# Altium PCB PCB.PcbDoc
Units mil, origin at the board's own origin, x right, y up, seen from the top; angles counter-clockwise.
Board outline 1696.7 x 734.6 mil, 2 copper layers (Top Layer, Bottom Layer); 28 components, 23 nets, 102 pads, 24 vias.
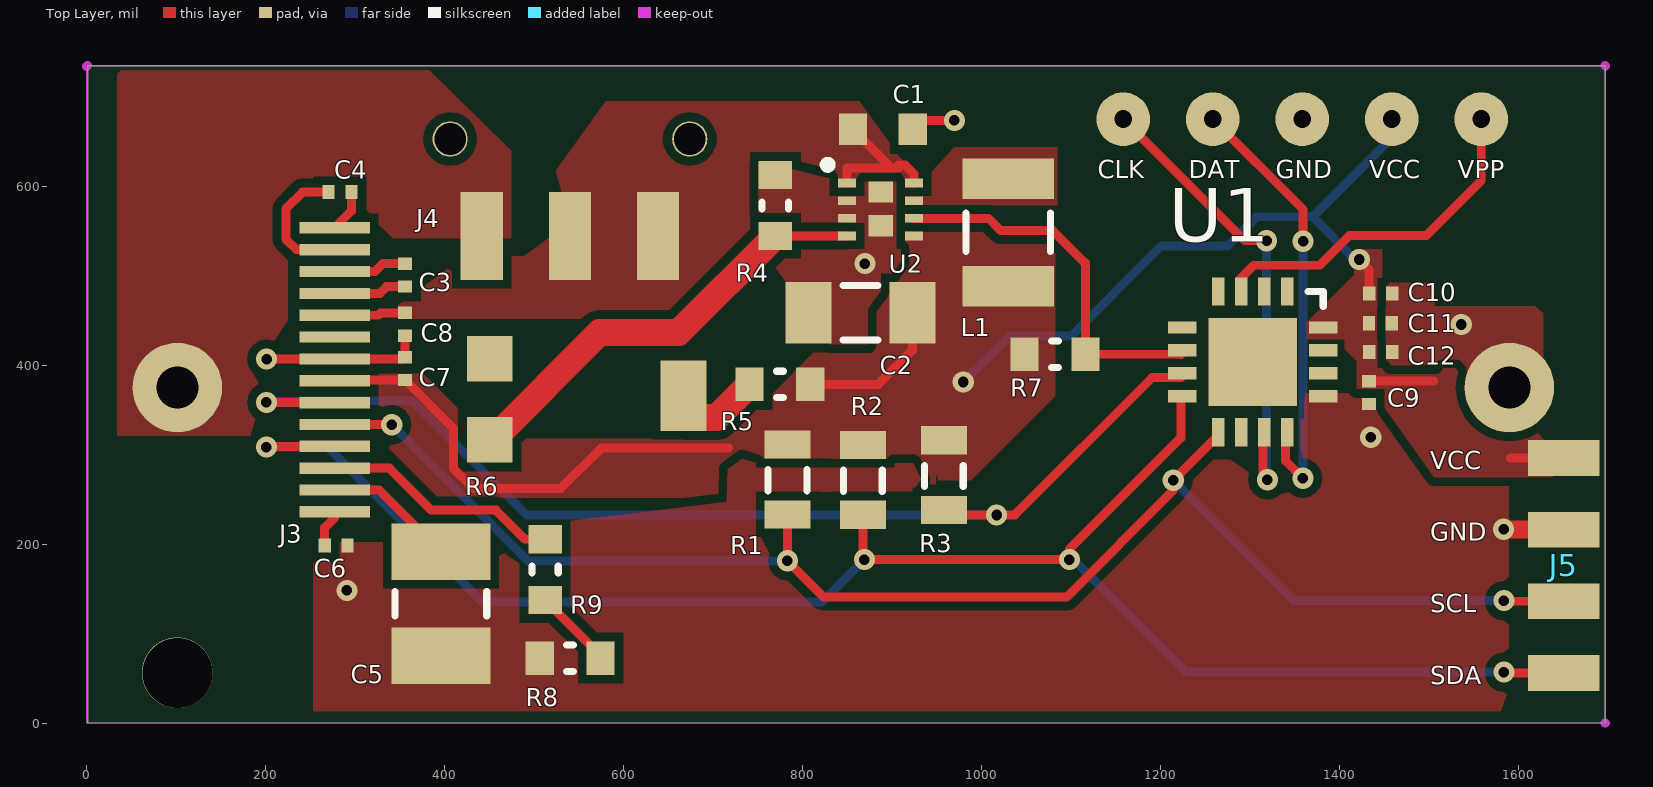
[diagram p0: Top Layer view]
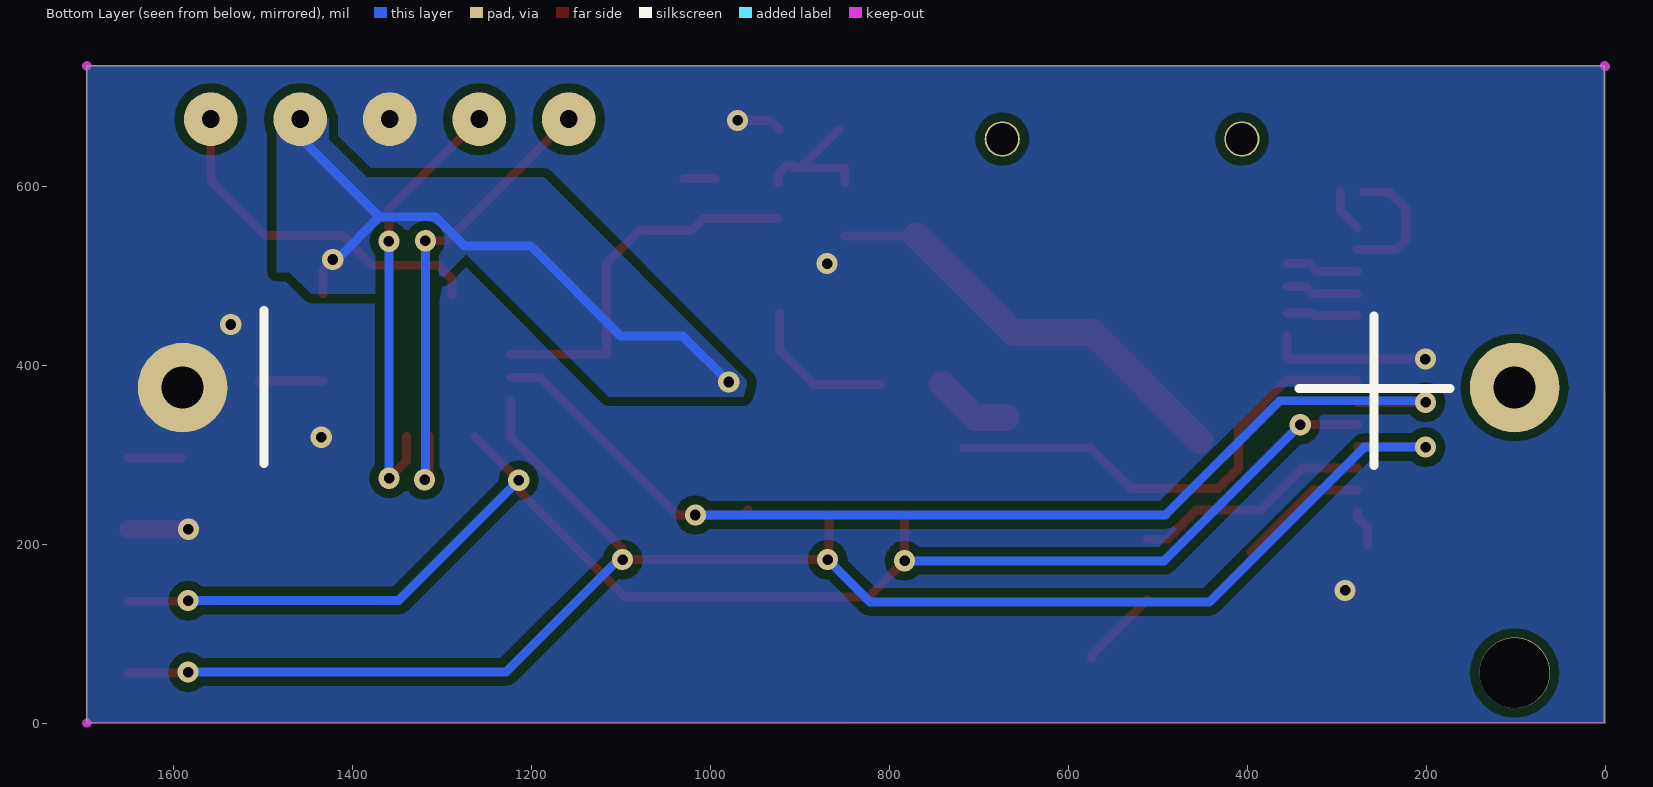
[diagram p1: Bottom Layer view, seen from below]

## Layer stack, top to bottom
Top Solder: solder mask 0.4, Solder Resist, Dk 3.5
Top Layer: signal copper 1.4
Dielectric1: dielectric 12.6, FR-4, Dk 4.8
Bottom Layer: signal copper 1.4
Bottom Solder: solder mask 0.4, Solder Resist, Dk 3.5

## Board outline
0.1,0.1 1.1,1.1 1.1,734.4 1696.5,734.4 1696.8,734.1 1696.8,-0.2

## Design rules (kind name [scope] priority, off if disabled: settings)
Clearance [All] p1: gap=10 ignorepadtopadclearanceinfootprint=FALSE except(0: Arc-Hole Track-Hole SMDPad-Hole THPad-Hole Via-Hole Fill-Hole Poly-Hole Region-Hole Text-Hole)
PlaneConnect [All] p1: planeconnectstyle=Direct reliefexpansion=20 reliefentries=4 reliefconductorwidth=10 reliefairgap=10
PolygonConnect [All] p1: connectstyle=Direct reliefconductorwidth=10 reliefentries=4 polygonreliefangle="90 Angle" airgapwidth=10
RoutingVias [All] p1: holewidth=28 width=50 viastyle="Through Hole" minholewidth=28 minwidth=50 maxholewidth=28 maxwidth=50
SilkToSolderMaskClearance SilkscreenOverComponentPads [IsPad] p1: minsilkscreentomaskgap=10 clearancetoexposedcopper=TRUE
SolderMaskExpansion [All] p1: expansion=4 istentingtop=FALSE
Width [All] p1: maxlimit=30 minlimit=10 preferedwidth=10
28 further rules are at their usual default settings.

## Components (designator, comment, footprint, x,y, rotation, side; value= is the part's Value field where it differs from the comment)
C1 "10uF CON1608" CAPC1608X06N 889.6,663.3 r180 top
C2 "22uF CON3216" CAPC3216X06N 864.6,458.3 r0 top
C3 "1uF 16V X5R CON0603" CAPC0603X06N 355.9,513.3 r270 top
C4 "1uF 16V X5R CON0603" CAPC0603X06N 295.9,593.3 r180 top
C5 "4.7uF 16V X7R CON3528-31" CAPC3524X06N 395.9,133.3 r90 top
C6 "2.2uF CON0603" CAPC0603X06N 265.9,198.3 r0 top
C7 "1uF CON0603" CAPC0603X06N 355.9,383.3 r90 top
C8 "1uF CON0603" CAPC0603X06N 355.9,458.3 r270 top
C9 "100nFCON0603" CAPC0603X06N 1432.7,356.5 r90 top
C10 "100nF CON0603" CAPC0603X06N 1458.6,479.9 r180 top
C11 "" CAPC0603X06N 1458.3,446.7 r180 top
C12 "100nF CON0603" CAPC0603X06N 1458.7,414.4 r180 top
J3 "PANTALLA" PANTALLA 325.9,553.3 r180 top
J4 "SLIDER" JS102011SAQN 540,544.3 r180 top
J5 "SENSORCONECTOR" ConectorSMD1,3mm 1650.4,124.4 r0 top
L1 "2.2uH INDCM322522" INDC3225X06N 1029.6,548.3 r270 top
R1 "10k RES2012" RESC2012X06N 783,271.2 r90 top
R2 "10k RES2012" RESC2012X06N 867.3,270.8 r90 top
R3 "10k RES2012" RESC2012X06N 957.8,276 r90 top
R4 "20k RES1608" RESC1608X06N 769.6,578.3 r270 top
R5 "110k RES1608" RESC1608X06N 774.6,378.3 r0 top
R6 "POTENCIOMETRO 10k" POTENCIOMETRO 450.5,316.6 r90 top
R7 "110k RES1608" RESC1608X06N 1082,412.1 r0 top
R8 "20k RES1608" RESC1608X06N 540.3,72.6 r0 top
R9 "110k RES1608" RESC1608X06N 512.2,171.4 r90 top
U1 "PIC16F1825" "PIC16(L)F1825 QFN" 1302.9,403.6 r270 top
U2 "TPS62080A" TPS62080 849.6,603.3 r0 top
? "BATERIA" BATERIA 101.5,374.9 r90 top locked

## Footprints (in the part's own frame and the unit in brackets; to place one, negate y for a bottom-side part, rotate by r counter-clockwise, add the part's x,y. Pads: shape width x height; smd on the part's side, far side on the other; paste and mask are expansions set on the pad)
BATERIA [mm]
  round 2.54 hole 1.19: 0(0,0) 1(0,-37.8)
  body extent -9.15,-40.35 9.15,2.55, height 17.3
CAPC0603X06N [mm] "Chip Capacitor, 2-Leads, Body 0,6x0,3mm, IPC Medium Density"
  rect 0.35x0.4 smd: 1(0,0) 2(0.65,0)
  body extent 0,-0.18 0.65,0.17, height 0.6
CAPC1608X06N [mm] "Chip Capacitor, 2-Leads, Body 1,6x0,8mm, IPC Medium Density"
  rect 0.8x0.9 smd: 1(-0.85,0) 2(0.85,0)
  body extent -0.8,-0.4 0.8,0.4, height 0.6
CAPC3216X06N [mm] "Chip Capacitor, 2-Leads, Body 3,2x1,6mm, IPC Medium Density"
  rect 1.3x1.75 smd: 1(-1.475,0) 2(1.475,0)
  silkscreen extent -0.5,-0.77 0.5,0.77, body extent -1.6,-0.8 1.6,0.8, height 0.6
CAPC3524X06N [mm] "Chip Capacitor, 2-Leads, Body 3,5x2,4mm, IPC Medium Density"
  rect 1.6x2.8 smd: 1(-1.475,0) 2(1.475,0)
  silkscreen extent -0.35,-1.3 0.35,1.3, body extent -1.75,-1.4 1.75,1.4, height 0.6
ConectorSMD1,3mm [mil]
  rect 80x40 smd: 0(0,-68.3) 1(0,11.7) 2(0,91.7) 3(0,171.7)
INDC3225X06N [mm] "Chip Inductor, 2-Leads, Body 3,2x2,5mm, IPC Medium Density"
  rect 1.15x2.6 smd: 1(-1.525,0) 2(1.525,0)
  silkscreen extent -0.55,-1.2 0.55,1.2, body extent -1.62,-1.26 1.62,1.26, height 0.6
JS102011SAQN [mm]
  rect 1.2x2.5 smd: 0(-2.5,0) 1(0,0) 2(2.5,0)
  round 1 hole 0.9: 5(-3.4,-2.75)
  round 1 hole 0.9 mask+0.102: 5(3.4,-2.75)
  body extent -4.5,-6.85 4.5,-1.25, height 3.5
PANTALLA [mm] "96x16 de Midas"
  rect 2x0.32 smd: 1(1.24,0) 2(1.24,0.62) 3(1.24,1.24) 4(1.24,1.86) 5(1.24,2.48) 6(1.24,3.1) 7(1.24,3.72) 8(1.24,4.34) 9(1.24,4.96) 10(1.24,5.58) 11(1.24,6.2) 12(1.24,6.82) 13(1.24,7.44) 14(1.24,8.06)
"PIC16(L)F1825 QFN" [mm] "QFN, 16-Leads, Body 4,0x4,0mm (max), Pitch 0,65mm, IPC Medium Density"
  rect 0.8x0.35 smd: 1(-2,0.975) 2(-2,0.325) 3(-2,-0.325) 4(-2,-0.975) 9(2,-0.975) 10(2,-0.325) 11(2,0.325) 12(2,0.975)
  rect 0.35x0.8 smd: 5(-0.975,-2) 6(-0.325,-2) 7(0.325,-2) 8(0.975,-2) 13(0.975,2) 14(0.325,2) 15(-0.325,2) 16(-0.975,2)
  rect 2.5x2.5 smd: 17(0,0)
  silkscreen extent -2,1.58 -1.58,2, body extent -2,-2 2,2, height 1
POTENCIOMETRO [mm]
  rect 1.3x1.3 smd: 0(0,0) 1(2.3,0)
  rect 2x1.3 smd: 2(1.25,-5.5)
  body extent -1.07,-4.96 3.43,-0.46, height 2.8
RESC1608X06N [mm] "Chip Resistor, 2-Leads, Body 1,6x0,8mm, IPC Medium Density"
  rect 0.8x0.95 smd: 1(-0.864,0) 2(0.864,0)
  silkscreen extent -0.1,-0.38 0.1,0.38, body extent -0.8,-0.4 0.8,0.4, height 0.6
RESC2012X06N [mm] "Chip Resistor, 2-Leads, Body 2,0x1,2mm, IPC Medium Density"
  rect 0.8x1.3 smd: 1(-0.965,0) 2(1.016,0)
  silkscreen extent -0.3,-0.55 0.3,0.55, body extent -1,-0.62 1,0.63, height 0.6
TPS62080 [mm]
  rect 0.5x0.25 smd: 1(0,0) 2(0,-0.5) 3(0,-1) 4(0,-1.5) 5(1.9,-1.5) 6(1.9,-1) 7(1.9,-0.5) 8(1.9,0)
  rect 0.7x0.6 smd: 2(0.953,-0.257) 2(0.955,-1.209)
  body extent -0.05,-1.8 1.96,0.31, height 0.54

## Part data
C1: library part CON1608
C2: library part CON3216
C3 C4 C6 C7 C8 C9 C10 C11 C12: library part CON0603
C5: library part CON3528-31
L1: library part INDCM322522
R1 R2 R3: library part RES2012
R4 R5 R7 R8 R9: library part RES1608
R6: library part POTENCIOMETRO

## Free pads (board coordinates)
  round 60 hole 20: 0(1158.2,674.7) 1(1258.2,674.7) 2(1358.2,674.7) 3(1458.2,674.7) 4(1558.2,674.7)

## Via types
v1: diameter 23.62, hole 11.81, Top Layer to Bottom Layer, 23 vias
v2: diameter 78.74, hole 77.95, Top Layer to Bottom Layer, 1 vias

## Nets (pads, with @x,y where several pads share a name; then routed paths per layer and width w, separated by ;. In a path a pad name is that pad's centre, name@x,y a point inside that pad or via, vN(x,y) a via of type N, cw(c..) or ccw(c..) an arc to the next point about the centre after c; other vN are vias at no path point)
FB: R4.2 R6.0 U2.4 | length 492
  Top Layer w10: R4.2@769.6,542.87 770.98,544.25 U2.4
  Top Layer w30: R6.0@452.8,315.9 573.1,436.2 661.5,436.2 R4.2
GND: ?.1 C1.1 C2.1 C5.1 C6.2 C7.2 C8.2 C9.1 C10.1 C11.1 C12.1 J3.7 J5.2 pad.2 R4.1 R8.1 U1.13 U2.2 U2.3 | length 297.1
  Top Layer w10: v1(201.12,406.68) 276.91,406.68 J3.7 353.85,406.84 C7.2 C8.2 ; C1.1 933.06,673.3 v1(969.6,673.3)
  Top Layer w20: v1@1583.5,216.1 J5.2
  other v1: 290.9,148.3 1583.1,216.5 1434.8,319.4 1535.8,445.3 869.6,513.3
ICSPCLK: pad.0 U1.11 | length 534.4
  Top Layer w10: pad.0 1294,538.9 v1(1318.4,538.9) ; U1.11@1314.1,320.16 1314.1,277 v1(1319.3,271.8)
  Bottom Layer w10: v1(1318.4,538.9) 1318.4,272.7 v1(1319.3,271.8)
ICSPDAT: pad.1 U1.12 | length 497.5
  Top Layer w10: pad.1 1359.1,573.8 v1(1359.1,538.4) ; U1.12@1339.69,320.16 1339.69,292.81 v1(1358.9,273.6)
  Bottom Layer w10: v1(1358.9,273.6) 1358.9,538.2 v1(1359.1,538.4)
NetC3_1: C3.1 J3.3 | length 82.5
  Top Layer w10: J3.3 322.08,504.48 330.9,513.3 C3.1
NetC3_2: C3.2 J3.4 | length 82
  Top Layer w10: J3.4 327.67,480.07 335.31,487.71 C3.2
NetC4_1: C4.1 J3.1 | length 47.8
  Top Layer w10: J3.1 295.9,572.12 C4.1
NetC4_2: C4.2 J3.2 | length 148.5
  Top Layer w10: C4.2 241.41,593.3 222.71,574.6 222.71,540.79 234.61,528.89 J3.2
NetC5_2: C5.2 J3.13 | length 147.4
  Top Layer w10: J3.13 326.88,260.39 C5.2
NetC6_1: C6.1 J3.14 | length 42.3
  Top Layer w10: C6.1 265.9,218.3 277.08,229.48 J3.14
NetJ3_12: J3.12 R9.2 | length 268
  Top Layer w10: J3.12 338.2,284.8 385.13,237.87 457.23,237.87 489.7,205.4 R9.2
NetL1_1: L1.1 U2.7 | length 35
  Top Layer w10: L1.1@994.64,608.34 L1.1
NetR5_1: R5.1 R6.2 | length 87.9
  Top Layer w10: R5.1@739.17,378.3 R5.1@739.17,379.68
  Top Layer w30: R6.2@669.34,341.41 703.71,341.41 R5.1
NetR8_2: R8.2 R9.1 | length 90.5
  Top Layer w10: R9.1 574.3,75.3 R8.2
PG: R7.2 U1.6 U2.6 | length 420.8
  Top Layer w10: U2.6 1007.67,563.93 1021.4,550.2 1079.6,550.2 1116,513.8 R7.2 1222.16,412.1 U1.6@1222.56,411.7
RA2: U1.10
RES: J3.9 R3.1 U1.7 | length 1275.9
  Top Layer w10: v1@201.18,358.02 J3.9 ; R3.1 963.3,232.5 v1(1016.7,232.5) ; v1@1016.7,232.69 1037.09,232.69 1190.5,386.1 U1.7@1222.56,386.1
  Bottom Layer w10: v1(200.9,358.3) 202.71,360.11 363.89,360.11 491.5,232.5 v1(1016.7,232.5)
SCL: J3.10 J5.1 R1.1 U1.9 | length 1695.6
  Top Layer w10: J3.10 v1@340.59,333.62 ; R1.1 v1(783,181.3) 823.5,140.8 1094.95,140.8 1214.05,259.9 v1(1214.05,271.3) U1.9@1262.91,320.16 ; v1@1578.5,136.8 1579.2,136.1 J5.1
  Bottom Layer w10: v1(340.9,333.3) 493,181.2 493.1,181.3 v1(783,181.3) ; v1(1214.05,271.3) 1348.55,136.8 v1(1583.5,136.8)
SDA: J3.11 J5.0 R2.1 U1.8 | length 1947.6
  Top Layer w10: v1@201.81,309.21 J3.11 ; R2.1 867.3,184.3 v1(869,182.6) v1(1098,182.6) 1098,194 1222.56,318.56 U1.8@1222.56,360.51 ; v1@1584.9,56.9 1585.7,56.1 J5.0
  Bottom Layer w10: v1(200.9,308.3) 269.5,308.3 442.7,135.1 821.5,135.1 v1(869,182.6) ; v1(1098,182.6) 1102.7,182.6 1228.4,56.9 v1(1583.5,56.9)
VBAT: C1.2 C8.1 J3.5 J4.0 J4.1 U2.1 U2.8 | length 242.4
  Top Layer w10: J3.5 325.9,455.66 328.54,458.3 C8.1 ; U2.1 849.6,620.15 906.96,620.15 ; C1.2 896.14,623.3 ; 906.96,623.3 914.6,623.3 924.4,613.5 U2.8
VCC: C2.2 C7.1 C9.2 C10.2 C11.2 C12.2 J3.8 J5.3 L1.2 pad.3 R1.2 R2.2 R3.2 R5.2 R7.1 U1.16 U2.5 | length 1560
  Top Layer w10: J3.8 277.95,383.3 C7.1 409.91,329.29 409.91,284.8 432.51,262.2 529.93,262.2 575.03,307.3 717.4,307.3 ; R5.2@810.03,378.3 884.6,378.3 922.67,416.37 C2.2 ; v1(1421.8,517.9) 1433.01,506.69 C10.2 ; C9.2 1505.01,382.09 ; 1591,296.1 J5.3
  Bottom Layer w10: v1(979.5,381.1) 1030.8,432.4 1099.9,432.4 1197.48,529.98 ; 1200.68,533.18 1274.77,533.18 1307.29,565.71 1369.71,565.71 ; v1(1421.8,517.9) 1417.52,517.9 1369.71,565.71 ; pad.3 1458.2,654.21 1369.71,565.71
VOPP: ?.0 J4.2
VPP: pad.4 U1.3 | length 402.3
  Top Layer w10: U1.3@1288.5,477.64 1288.5,495.9 1304.1,511.5 1377.48,511.5 1410.69,544.71 1496.9,544.71 1558.2,606.01 pad.4
pads on no net: J3.6 J4.5 R6.1 U1.1 U1.2 U1.4 U1.5 U1.14 U1.15 U1.17
copper on no net:
  other v2: 101.5,56

## Polygon pours and split planes (outlines as drawn)
GND on Bottom Layer "Bottom-GND" (solid, pour order 45): 0.2,0.3 1696.2,-0.6 1696.4,735.6 1,734.6
VCC on Bottom Layer "bot-vcc" (solid, pour order 55): 959.1,376.3 959.1,383.1 970.8,394.8 1185.7,609.7 1271.48,609.7 1383.2,609.7 1383.5,609.4 1426.3,652.2 1426.3,675.5 1429.2,675.5 1449.6,695.9 1453.5,692 1480.7,692 1480.7,680.3 1488.4,672.6 1484.6,668.8 1484.6,503.6 1470.2,503.6 1446,479.4 1401.1,479.4 1317.4,479.4 1272.8,524 1113.5,364.7 963,364.7
GND on Top Layer "TOP-GND" (solid, pour order 44): 708.3,13.32 1560.19,13.32 1560.21,13.3 1560.31,13.42 1589,13.42 1589,337.14 1562.69,368 1553.68,357.43 1246.99,357.43 757.19,357.43 717.32,310.65
GND on Top Layer "TOP-GND" (solid, pour order 42): 1316.3,465.7 1618.67,465.7 1629.9,456.02 1627.69,454.12 1627.69,349.6 1556.39,349.6 1526.9,375.02 1511.06,388.67 1325.43,388.67
VCC on Top Layer "TOP-VCC" (solid, pour order 38): 1416.5,533.8 1416.5,501.1 1363.3,447.9 1363.3,428.4 1394.9,428.4 1416.5,406.8 1419.1,404.2 1419.1,373.1 1445.4,373.1 1450.7,378.4 1447.6,381.5 1447.6,531.1
VOPP on Top Layer "TOP-VOPP" (solid, pour order 27): 220.31,598.52 273.79,598.52 287.4,612.63 287.4,634.4 220.41,634.4 220.2,634.19
VCC on Top Layer "TOP-vcc" (solid, pour order 46): 1082.3,365 988.5,271.2 950.9,271.2 950.9,328.4 1017.4,394.9 1023.1,389.2 1082.5,389.2
VCC on Top Layer "TOP-VCC" (solid, pour order 40): 1419.1,396.53 1419.13,396.5 1534.02,396.5 1552.63,396.5 1634.99,309.57 1637.9,306.5 1637.9,274.7 1505.53,274.7 1504.95,275.31
VCC on Top Layer "TOP-VCC" (solid, pour order 37): 950.9,271.2 1044.7,365 1082.3,365 1082.3,524.3 1074.9,531.7 1050.2,556.4 898.1,556.4 898.1,461.4 898.8,460.7
VOPP on Top Layer "TOP-VOPP" (solid, pour order 35): 34.3,321.1 34.3,725.4 38.5,729.6 225,729.6 225,323 226.9,321.1
VBAT on Top Layer "TOP-VCC" (solid, pour order 33): 524.3,617.15 580.1,695 854.7,695 863.4,695 901.4,641.99 934.5,595.81 934.5,568.61 934.5,565.82 934.4,565.68 837.3,565.68 812.1,565.68 736.7,460.49 721.8,439.7 573.4,439.7
VBAT on Top Layer "TOP-VBAT" (solid, pour order 26): 348.31,447.7 353.8,451.7 560.02,451.7 574.42,451.7 657.1,512 655.18,513.4 655.18,593.8 587.03,593.8 583.88,591.5 488.31,521.8 457.46,521.8 423.31,521.8 347.9,466.8
VOPP on Top Layer "TOP-VOPP" (solid, pour order 24): 225,729.6 382.7,729.6 473.1,640.81 474.7,639.24 474.7,541.9 341.8,541.9 333.7,549.86 287.4,595.33 287.4,630.69 200.8,630.69 191.6,639.73
GND on Top Layer "TOP-GND" (solid, pour order 41): 1361.45,368.6 1416.78,368.6 1420.03,365.14 1422.17,367.41 1446.4,367.41 1446.4,301 1445.38,299.92 1438.88,293 1399.05,293 1392.09,293 1358.2,329.07
GND on Top Layer "TOP-GND" (solid, pour order 39): 1449.2,492.6 1449.6,492.2 1506.3,492.2 1506.3,400.3 1506.7,399.9 1447.9,399.9
GND on Top Layer "TOP-GND" (solid, pour order 32): 729.19,249.1 747.6,236.78 747.6,172.09 747.6,17.03 740.24,12.1 738.7,13.13 253.36,13.13 253.36,178.04 246,182.97 274.22,201.86 342.49,201.86
GND on Top Layer "TOP-GND" (solid, pour order 25): 747.4,628.9 750.46,624.53 750.46,519.54 762.7,519.54 830.03,423.3 872.88,423.3 872.88,462.67 909.6,515.16 909.6,589.53
NetL1_1 on Top Layer "TOP-inductor" (solid, pour order 28): 914.6,578.3 1084.6,578.3 1084.6,643.3 969.6,643.3 919.6,589.13 914.6,589.13
GND on Top Layer "TOP-BajoConversor" (solid, pour order 31): 864.6,613.3 904.6,613.3 904.6,543.3 884.6,523.3 884.6,498.3 857.16,525.74 850.24,525.74
VBAT on Top Layer "TOP-VbatConversor" (solid, pour order 36): 839.6,598.3 839.6,620.79 834.31,626.09 836.52,628.3 874.6,628.3 874.6,608.3 864.6,598.3
VCC on Top Layer "TOP-Vcc" (solid, pour order 49): 947.5,549.3 766.35,368.15 766.35,349.6 662,349.6 641,328.6 630.15,317.75 414.91,317.75 414.91,351.6 373.77,392.73 371.59,390.54 326.45,390.54 326.45,318.17 391.46,253.16 392.62,252 948.6,252

## Keep-outs
Keep-Out Layer:
  lines w0: 0.1,733.4 0.1,0.1 1696.5,0.1 ; 1.2,734.5 1696.4,734.5 ; 1696.8,-0.2 1696.8,734.1
  lines w10: 0.1,733.4 1.2,734.5 ; 1696.4,734.5 1696.8,734.1 ; 1696.5,0.1 1696.8,-0.2

## Silkscreen, mask and mechanical layers (free items; w line width, h text height)
Top Overlay:
  circle w10: c827.95,623.7 r3.85
  text "CLK" at 1129.8,608.6 h20
  text "DAT" at 1231.5,608.6 h20
  text "GND" at 1328.8,608.6 h20
  text "VCC" at 1432.8,608.6 h20
  text "VPP" at 1531.9,608.6 h20
  text "VCC" at 1501,283.6 h20
  text "GND" at 1501,203.6 h20
  text "SCL" at 1501,123.6 h20
  text "SDA" at 1501,43.6 h20